# EAGLE board chirp-ble-panel (EAGLE 6.6.0)
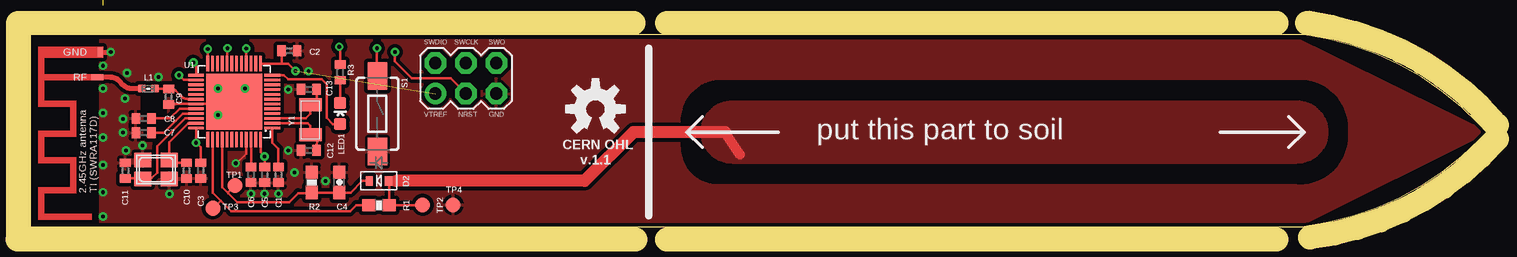
[diagram p0: board, top side]
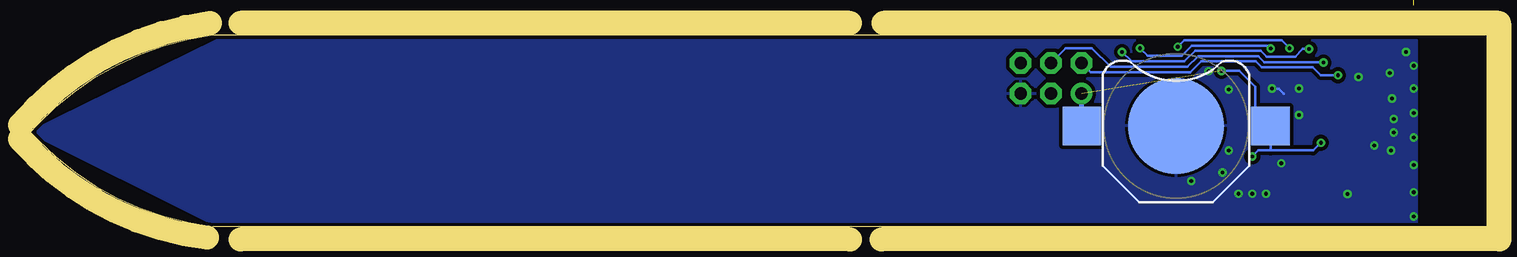
[diagram p1: board, bottom side, seen from below]

Size 121.41 x 15.99 mm. Coordinates in mm from the lower left corner, seen from the top.
Outline: 0,0 106.17,0 arc39 120.78,7.24 121.41,7.87 120.78,8.51 arc39 106.17,15.99 0,15.99 0,0
Copper layers (1*16): Top 0.035mm / dielectric 1mm / Bottom 0.035mm
Design rules "Fusion_eagle_rule_v1.1 *": minimum track width 0.2mm, minimum drill 0.3mm, track to track 0.2mm, track to pad 0.2mm, pad to pad 0.05mm, via to via 0.2mm, smd to smd 0mil, copper to edge 0.2mm, drill to drill 10mil, minimum pad ring 10mil, minimum via ring 6mil, stop-mask expansion 2mil, vias tented up to drill 0.3mm, thermal gap 10mil
Net classes: 0 Default: width 0.2 mm
tRestrict: area 9.5,9.5 to 10.9,10.9
Milling: 8 lines

## Footprints (pad centres in the part's own frame; a part is rotated, then mirrored left to right if it is on the bottom)
SWRA117D_RIGHT = smd 0.813 x 0.406: GND -0.45,0.25 | smd 0.508 x 1.016: RF -2.55,0.5
BATTCON_12MM = smd 8 x 8: GND 0,0 | smd 3.175 x 3.175: PWR@1 -7.874,0; PWR@2 7.874,0
C0402 = smd 0.7 x 0.9: 1 -0.65,0; 2 0.65,0
0603-CAP = smd 1.1 x 1: 1 -0.85,0; 2 0.85,0
SOD-523 = smd 0.8 x 0.6: A 0,-0.8; K 0,0.8
WE-MK_0402 = smd 0.6 x 0.6: 1 -0.55,0; 2 0.55,0
LED-0603 = smd 1 x 1: A 0,-0.877; C 0,0.877
NX3225 = smd 1.4 x 1.2: 1 -1.1,-0.8; 2 1.1,-0.8; 3 1.1,0.8; 4 -1.1,0.8
0603-RES = smd 1.1 x 1: 1 -0.85,0; 2 0.85,0
R0402 = smd 0.7 x 0.9: 1 -0.65,0; 2 0.65,0
TACTILE-SWITCH-1101NE = smd 2.3 x 1.6: 1 -3.15,0; 2 3.15,0
MA03-2 = drill 1.016 pad 1.778 octagon: GND 2.54,-1.27; NRST 0,-1.27; SWCLK 0,1.27; SWDIO -2.54,1.27; SWO 2.54,1.27 | drill 1.016 pad 1.778: VTREF -2.54,-1.27
B1,27 = smd 1.27 x 1.27: TP 0,0
QFN48 = smd 1.3 x 0.226: 1 -3.17,2.2; 2 -3.17,1.8; 3 -3.17,1.4; 4 -3.17,1; 5 -3.17,0.6; 6 -3.17,0.2; 7 -3.17,-0.2; 8 -3.17,-0.6; 9 -3.17,-1; 10 -3.17,-1.4; 11 -3.17,-1.8; 12 -3.17,-2.2; 25 3.17,-2.2; 26 3.17,-1.8; 27 3.17,-1.4; 28 3.17,-1; 29 3.17,-0.6; 30 3.17,-0.2; 31 3.17,0.2; 32 3.17,0.6; 33 3.17,1; 34 3.17,1.4; 35 3.17,1.8; 36 3.17,2.2 | smd 0.226 x 1.3: 13 -2.2,-3.17; 14 -1.8,-3.17; 15 -1.4,-3.17; 16 -1,-3.17; 17 -0.6,-3.17; 18 -0.2,-3.17; 19 0.2,-3.17; 20 0.6,-3.17; 21 1,-3.17; 22 1.4,-3.17; 23 1.8,-3.17; 24 2.2,-3.17; 37 2.2,3.17; 38 1.8,3.17; 39 1.4,3.17; 40 1,3.17; 41 0.6,3.17; 42 0.2,3.17; 43 -0.2,3.17; 44 -0.6,3.17; 45 -1,3.17; 46 -1.4,3.17; 47 -1.8,3.17; 48 -2.2,3.17 | smd 4.66 x 4.66: GND 0,0
ABS07 = smd 1.1 x 1.9: 1 -1.25,0; 2 1.25,0

## Placement (x,y rotation side)
ANTENNA  ANTENNA_1RIGHT  [SWRA117D_RIGHT]  6.1,14.99 90 top
BAT1  [BATTCON_12MM]  25.91,8.38 0 bottom
C1  100nF  [C0402]  20.7,4.32 270 top
C2  100nF  [C0402]  21.62,14.65 0 top
C3  100nF  [C0402]  14.22,4.66 270 top
C4  1uF  [0603-CAP]  25.78,3.68 90 top
C5  4.7uF  [C0402]  19.56,4.32 90 top
C6  4.7uF  [C0402]  18.42,4.32 90 top
C7  100pF  [C0402]  9.47,7.83 180 top
C8  N.C.  [C0402]  9.47,9.01 180 top
C9  0.8pF  [C0402]  11.55,10.83 90 top
C10  12pF  [C0402]  13.05,4.66 270 top
C11  12pF  [C0402]  7.95,4.66 90 top
C12  12pF  [C0402]  23.24,6.35 180 top
C13  12pF  [C0402]  23.24,11.43 0 top
D2  DIODE-SCHOTTKY_  [SOD-523]  29.08,3.81 90 top
L1  3.9nH 744784039  [WE-MK_0402]  9.87,11.5 180 top
LED1  [LED-0603]  25.85,9.41 0 top
Q1  ILCX13-FF5F18-32.0000  [NX3225]  10.51,4.75 0 top
R1  10K  [0603-RES]  29.08,1.78 180 top
R2  510K  [0603-RES]  23.5,3.68 90 top
R3  [R0402]  25.84,12.84 270 top
S1  SWITCH-MOMENTARY-2SMD-1101NE  [TACTILE-SWITCH-1101NE]  28.96,9.4 270 top
SWD  [MA03-2]  36.32,12.35 0 top
TP1  TPB1,27  [B1,27]  17.08,3.43 0 top
TP2  TPB1,27  [B1,27]  32.71,1.81 0 top
TP3  TPB1,27  [B1,27]  15.24,1.52 0 top
TP4  TPB1,27  [B1,27]  35.26,1.8 0 top
U1  NRF52832  [QFN48]  17.02,10.41 180 top
Y1  ABS07-32.768KHZ-7  [ABS07]  23.37,8.89 270 top

## Library data of the parts
ANTENNA = ant-planar-1
BAT1 = SparkFun-Electromechanical; PROD_ID: BATT-08044
C1-C3 C5-C13 R3 = rcl
C4 R1 R2 = SparkFun
D2 = microbuilder
L1 = SignalCommunications
LED1 = SparkFun-LED
Q1 = adafruit
S1 = SparkFun-Electromechanical; PROD_ID: SWCH-00815
SWD = WB; OC_FARNELL: unknown; OC_NEWARK: unknown
TP1-TP4 = testpad
U1 = NordicSemi
Y1 = abracon

## Nets
ANT: C9.2 L1.1 U1.30
BTN: S1.1 U1.16
CAP_V: C4.1 D2.K R2.1 TP1.TP U1.40
CLK_OUT: R1.2 TP3.TP U1.38
DCC: U1.47
GND: ANTENNA.GND BAT1.GND C1.2 C2.2 C3.2 C4.2 C5.1 C6.1 C7.2 C8.2 C9.1 C10.2 C11.2 C12.2 C13.1 Q1.2 Q1.4 R2.2 S1.2 SWD.GND TP4.TP U1.31 U1.45 U1.GND
LED_A: LED1.A U1.12
LED_K: R3.1 U1.20
N$1: C8.1 U1.32
N$2: C10.1 Q1.3 U1.35
N$4: ANTENNA.RF L1.2
N$6: LED1.C R3.2
N$7: C11.1 Q1.1 U1.34
N$10: C1.1 U1.1
N$11: C6.2 U1.46
N$12: C7.1 U1.33
NRST: SWD.NRST U1.24
P$1: U1.44
SWDCLK: SWD.SWCLK U1.25
SWDIO: SWD.SWDIO U1.26
V_CAP: D2.A R1.1 TP2.TP
VCC: BAT1.PWR@1 BAT1.PWR@2 C2.1 C3.1 C5.2 SWD.VTREF U1.13 U1.36 U1.48
Y1_M: C13.2 U1.3 Y1.1
Y1_P: C12.1 U1.2 Y1.2

## Tracks (layer width: path | path; a pad name or v marks a point on that pad's centre or on a via)
ANT
  Top 0.2: U1.30 13.22,10.61 arc-45 12.51,10.91 12.16,11.31 arc45 11.75,11.45 11.58,11.45 C9.2 10.43,11.48 L1.1
BTN  (via drill 0.3 pad 0.7)
  Top 0.2: v28.91,14.85 28.91,12.59 S1.1
  Top 0.203: U1.16 v18.02,14.84
  Bottom 0.2: 27.38,14.22 28.28,14.22 v28.91,14.85
  Bottom 0.203: 18.02,14.75 v18.02,14.84 18.24,15.06 24.6,15.06 25.44,14.22 27.38,14.22
CAP_V
  Top 0.203: U1.40 16.02,3.29 16.51,2.79 | D2.K 27.69,3.81 26.71,2.83 C4.1 R2.1 23.46,2.79 22.35,2.79 21.59,2.03 17.27,2.03 16.51,2.79 | TP1.TP 16.51,2.86 16.51,2.79
CLK_OUT
  Top 0.203: U1.38 15.22,2.82 15.88,2.16 | 15.88,2.16 16.76,1.27 26.67,1.27 27.18,1.78 R1.2 | TP3.TP 15.88,2.16
GND  (via drill 0.3 pad 0.7)
  Top 0.2: U1.31 13.84,10.2 | C9.1 11.79,10.21 U1.31 | v15.68,9.29 14.75,10.21 U1.31 | U1.GND 17.02,10.61 v17.91,11.49
  Top 0.203: U1.31 | U1.45 18.02,6.08 17.27,5.33 17.27,5.08
  Top 0.406: ANTENNA.GND v6.73,14.54
  Bottom 0.2: v17.91,11.49 17.35,11.49 16.91,11.05
  other vias: 15.68,11.49 18.42,2.73 19.56,2.73 20.7,2.73 24.64,3.81 21.52,6.35 11.62,2.72 9.39,6.74 7.76,8.97 7.76,7.83 22.03,4.51 21.52,11.43 17.14,5.27 6.1,13.4 6.1,11.49 6.1,9.46 6.1,7.43 6.1,5.14 6.1,2.86 6.1,0.83 23.21,12.94 8.1,12.8 7.91,10.65 10.71,12.45 7.99,6.34
  pour Top (isolate 0.305): 5.84,15.48 5.84,0.25 54.1,0.25 54.1,15.48
  pour Bottom (isolate 0.305): 5.84,15.48 105.84,15.48 121.41,7.87 106.17,0.25 5.84,0.25
  pour Top (isolate 0.305, no thermals): 54.1,15.48 105.84,15.48 121.41,7.87 106.17,0.25 54.1,0.25 54.1,6.6 arc90 57.28,3.43 105.54,3.43 arc90 109.98,7.24 109.98,8.51 arc90 105.54,12.32 57.91,12.32 arc90 54.1,9.14
GND1  (16 unrouted)
GND2  (16 unrouted)
GND3  (16 unrouted)
LED_A
  Top 0.2: U1.12 21.15,12.61 21.51,12.25 24.31,12.25 24.71,11.85 24.71,9.05 25.23,8.54 LED1.A
LED_K  (via drill 0.3 pad 0.7)
  Top 0.2: R3.1 25.84,14.91 v25.77,14.99
  Top 0.203: U1.20 16.42,14.83 v16.45,14.86
  Bottom 0.203: 16.45,14.8 v16.45,14.86 17.08,15.54 25.21,15.54 v25.77,14.99
N$1
  Top 0.2: U1.32 12.47,9.81 11.66,9.01 C8.1
N$2
  Top 0.203: U1.35 13.19,8.61 11.61,7.03 Q1.3 11.84,5.31 C10.1
N$4
  Top 0.4: L1.2 8.48,11.5 arc-45 7.78,11.79 7.42,12.14 arc45 6.72,12.44 ANTENNA.RF
  Top 0.406: ANTENNA.RF arc-45 5.62,12.45
N$6
  Top 0.2: LED1.C R3.2
N$7
  Top 0.203: U1.34 12.93,9.01 10.59,6.68 10.59,4.5 10.16,4.06 9.52,4.06 Q1.1 9.34,4.01 C11.1
N$10
  Top 0.203: C1.1 20.7,6.48 20.19,6.99 U1.1
N$11
  Top 0.203: C6.2 U1.46
N$12
  Top 0.2: 12.13,8.83 11.13,7.83 C7.1
  Top 0.203: U1.33 12.72,9.41 12.13,8.83
NRST  (via drill 0.3 pad 0.7)
  Top 0.2: SWD.NRST 35.05,12.35 31.81,12.35 30.41,13.75 v30.41,14.55
  Top 0.203: U1.24 v14.82,14.8 v14.81,14.8
  Bottom 0.2: 29.61,13.75 v30.41,14.55
  Bottom 0.203: v14.81,14.8 15.36,14.8 15.96,14.15 18.36,14.15 18.86,14.65 24.31,14.65 25.21,13.75 29.61,13.75
S$7  (6 unrouted)
S$8  (1 unrouted)
S$10  (2 unrouted)
S$11  (1 unrouted)
S$12  (1 unrouted)
S$28  (6 unrouted)
S$29  (1 unrouted)
S$30  (1 unrouted)
S$31  (2 unrouted)
S$32  (1 unrouted)
S$48  (6 unrouted)
S$49  (1 unrouted)
S$50  (1 unrouted)
S$51  (2 unrouted)
S$52  (1 unrouted)
SWDCLK  (via drill 0.3 pad 0.7)
  Top 0.203: U1.25 13.86,12.63 13.86,13.4 v13.61,13.65
  Bottom 0.2: 24.96,13.3 31.36,13.3 32.91,14.85 35.09,14.85 SWD.SWCLK
  Bottom 0.203: v13.61,13.65 13.66,13.7 18.56,13.7 19.06,14.2 24.06,14.2 24.96,13.3
SWDIO  (via drill 0.3 pad 0.7)
  Top 0.2: U1.26 12.8,12.21 v12.41,12.6
  Bottom 0.2: v12.41,12.6 13.86,12.6 14.51,13.25 18.76,13.25 19.26,13.75 23.81,13.75 24.71,12.85 33.01,12.85 SWD.SWDIO
V_CAP
  Top 0.2: TP2.TP 32.68,1.78 R1.1
  Top 0.203: D2.A 29.93,3.76 | 29.93,3.76 R1.1 | 29.93,3.76 29.98,3.81 30.48,3.81
  Top 0.813: 57.91,7.87 59.16,5.99
  Top 1.016: 57.91,7.87 50.29,7.87 46.23,3.81 30.48,3.81
  pour Top (no thermals): 56.01,7.87 arc-90 58.55,10.41 105.54,10.41 arc-90 108.08,7.87 arc-90 105.54,5.33 58.55,5.33 arc-90
VCC  (via drill 0.3 pad 0.7)  (1 unrouted)
  Top 0.2: 19.93,13.58 20.91,13.58 | 20.91,13.58 21.51,13.58 v22.12,12.97 | C2.1 20.97,13.64 20.91,13.58
  Top 0.203: C3.1 14.22,6.6 v13.85,6.98 | v13.85,6.98 U1.36 | C5.2 v19.56,5.84 19.22,6.18 U1.48 | U1.13 19.93,13.58 | v13.85,6.98 v13.84,6.98
  Bottom 0.2: v22.12,12.97 20.63,12.97 19.3,11.65 19.3,9.65 | 17.91,8.5 BAT1.PWR@2
  Bottom 0.203: v13.84,6.98 14.48,6.35 18.03,6.35 | 18.03,6.35 19.05,6.35 v19.56,5.84 | 18.03,6.35 BAT1.PWR@2 19.3,9.65
  Bottom 0.406: BAT1.PWR@1 SWD.VTREF
VCC1  (1 unrouted)
VCC2  (1 unrouted)
VCC3  (1 unrouted)
Y1_M
  Top 0.2: 23.37,9.4 22.98,9.01 U1.3
  Top 0.203: 23.37,9.4 Y1.1 23.89,10.66 C13.2
Y1_P
  Top 0.203: U1.2 23.14,8.61 23.37,8.38 Y1.2 23.39,7.62 23.88,7.62 23.95,7.54 C12.1

## Text on the board
_tsilk: CERN OHL | put this part to soil | v.1.1
_tNames: C2 | U1 | R3 | L1 | S1 | C9 | C13 | Y1 | C8 | C7 | C12 | LED1 | TP1 | D2 | C11 | C10 | C3 | C6 | C5 | C1 | TP4 | TP3 | R2 | C4 | R1 | TP2